# Altium PCB SW-SMD_8P-L11.1-W6.2-P2.54-LS9.8.pcbdoc
Units mm, origin at the board's own origin, x right, y up, seen from the top; angles counter-clockwise.
Board outline 23.91 x 24.81 mm, 2 copper layers (Top Layer, Bottom Layer); 1 components, 0 nets, 8 pads, 0 vias.
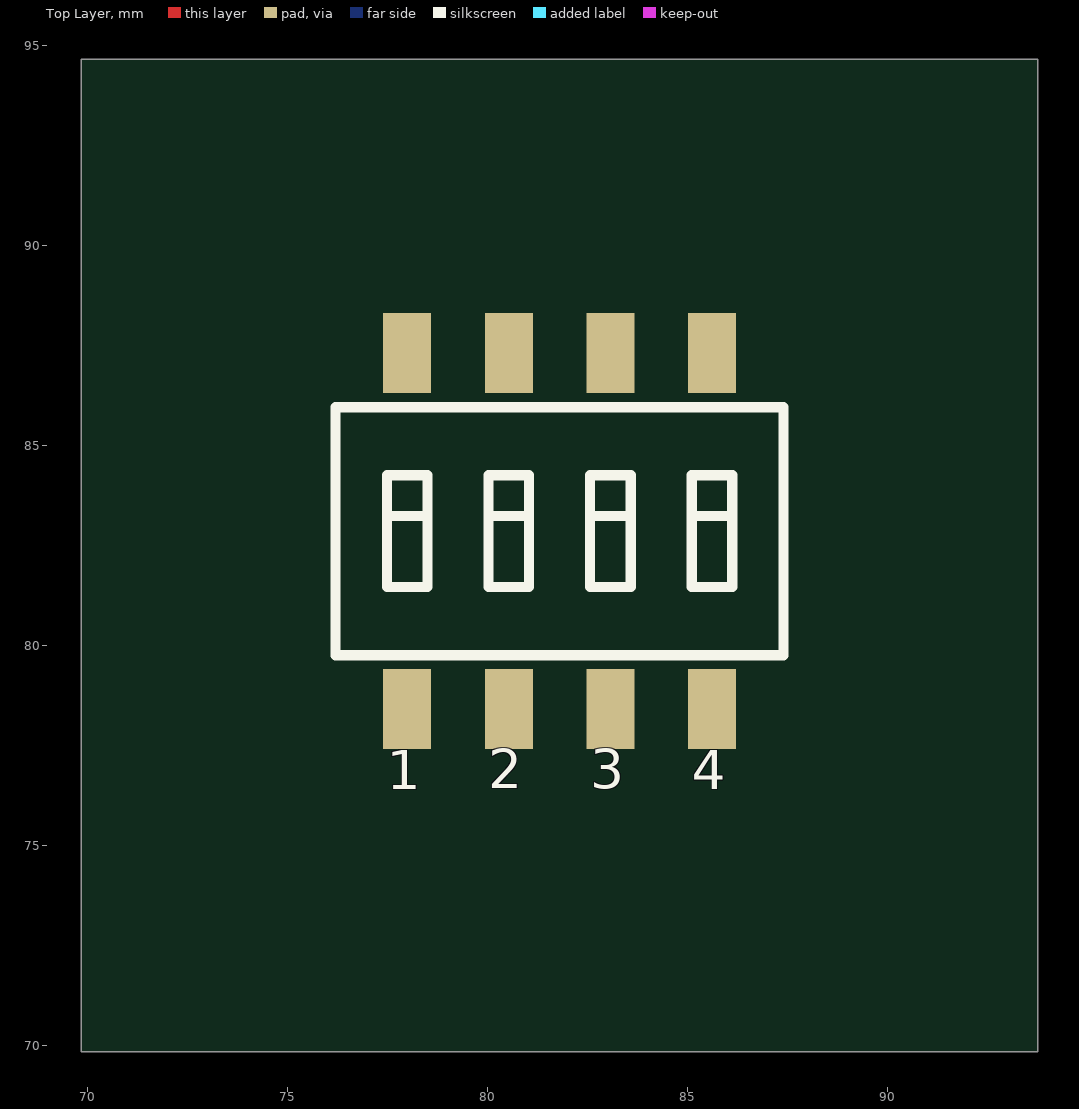
[diagram p0: Top Layer view]
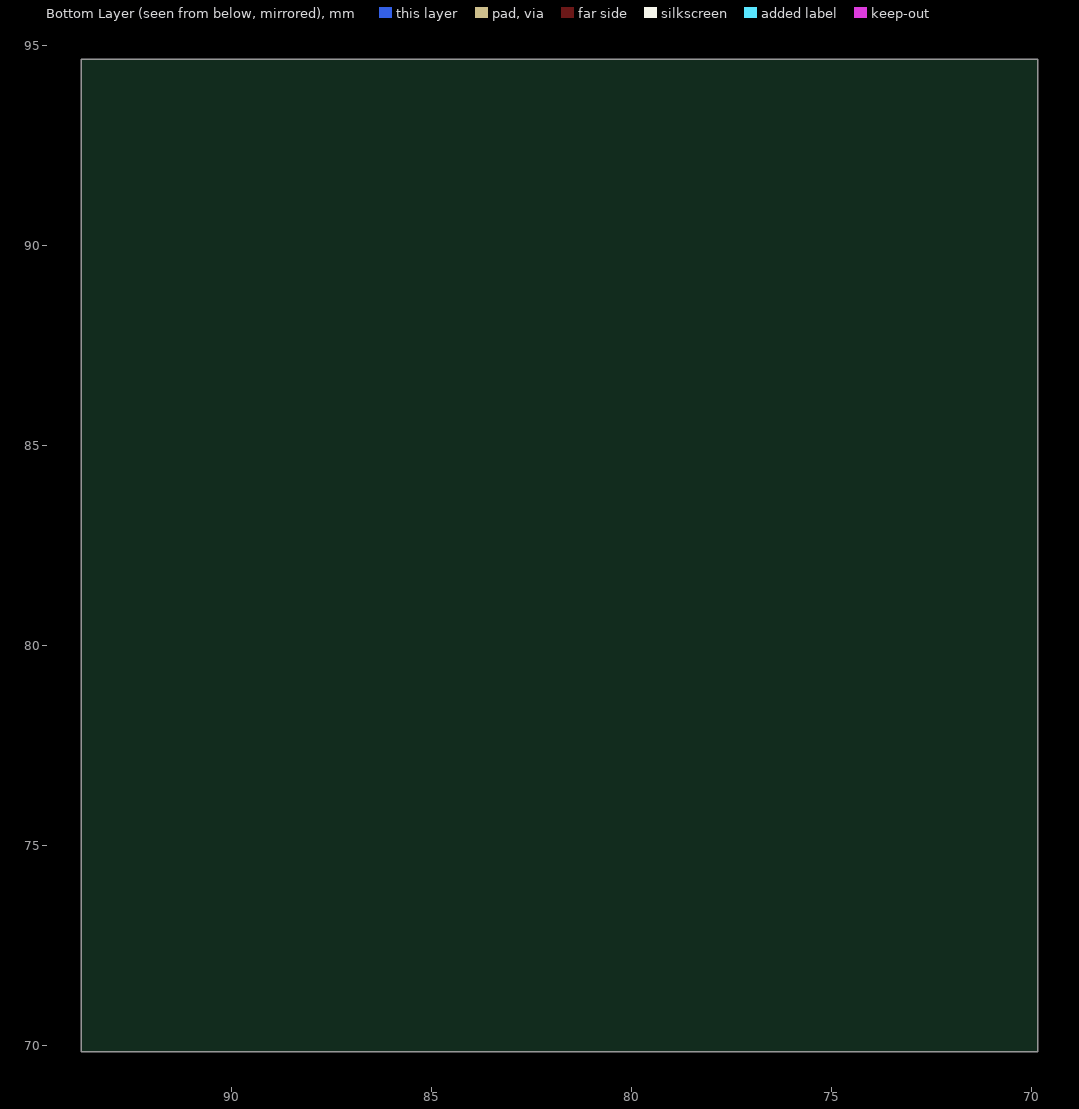
[diagram p1: Bottom Layer view, seen from below]

## Layer stack, top to bottom
Top Layer: signal copper (thickness not stored)
Dielectric: dielectric 0.32, FR-4, Dk 4.8
Bottom Layer: signal copper (thickness not stored)

## Board outline
93.76,69.85 69.85,69.85 69.85,94.66 93.76,94.66

## Components (designator, comment, footprint, x,y, rotation, side; value= is the part's Value field where it differs from the comment)
? "SW-SMD_8P-L11.1-W6.2-P2.54-LS9.8" SW-SMD_8P-L11.1-W6.2-P2.54-LS9.8 81.81,82.86 r0 top

## Footprints (in the part's own frame and the unit in brackets; to place one, negate y for a bottom-side part, rotate by r counter-clockwise, add the part's x,y. Pads: shape width x height; smd on the part's side, far side on the other; paste and mask are expansions set on the pad)
SW-SMD_8P-L11.1-W6.2-P2.54-LS9.8 [mm]
  rect 1.2x2 smd paste+0 mask+0.051: 1(-3.81,-4.45) 2(-1.27,-4.45) 3(1.27,-4.45) 4(3.81,-4.45) 5(3.81,4.45) 6(1.27,4.45) 7(-1.27,4.45) 8(-3.81,4.45)
  silkscreen extent -5.6,-3.1 5.6,3.1

## Nets (pads, with @x,y where several pads share a name; then routed paths per layer and width w, separated by ;. In a path a pad name is that pad's centre, name@x,y a point inside that pad or via, vN(x,y) a via of type N, cw(c..) or ccw(c..) an arc to the next point about the centre after c; other vN are vias at no path point)
pads on no net: ?.1 ?.2 ?.3 ?.4 ?.5 ?.6 ?.7 ?.8

## Text inside footprints (layer, text, board x,y; h text height)
?: Top Silkscreen Layer "1" at 77.492,76.41 h0.98; Top Silkscreen Layer "2" at 80.032,76.431 h0.98; Top Silkscreen Layer "3" at 82.572,76.431 h0.98; Top Silkscreen Layer "4" at 85.112,76.41 h0.98